# EAGLE board Placa sensores (EAGLE 7.5.0)
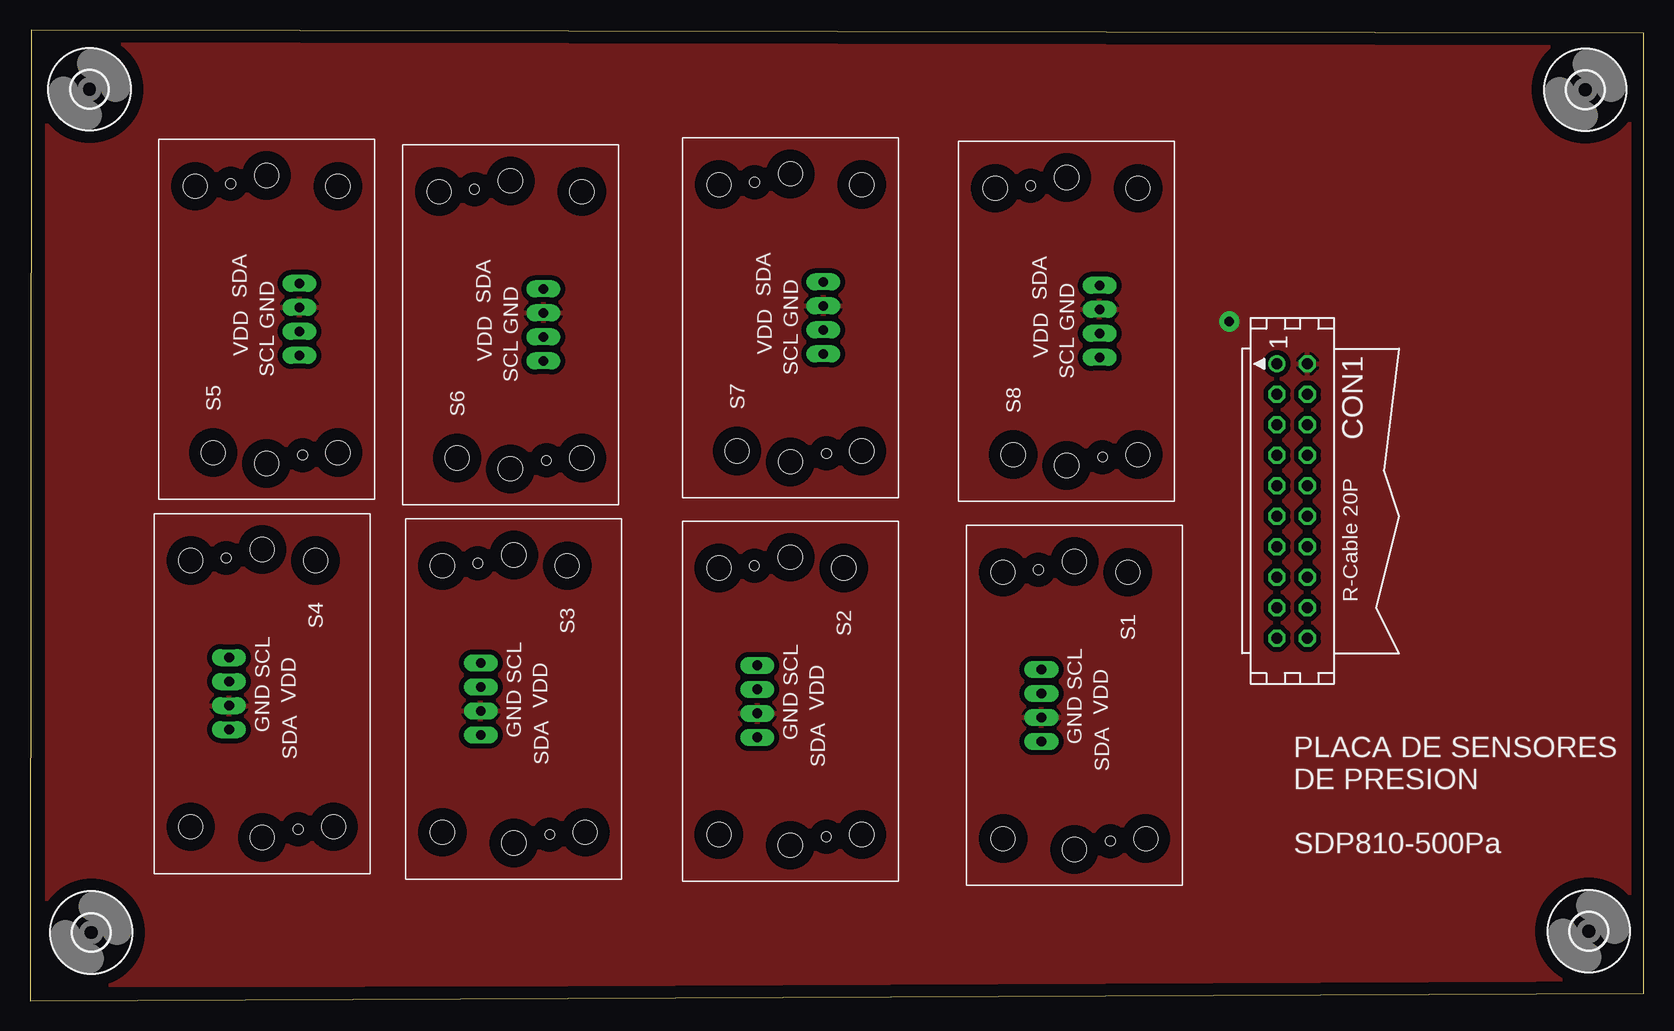
[diagram p0: board, top side]
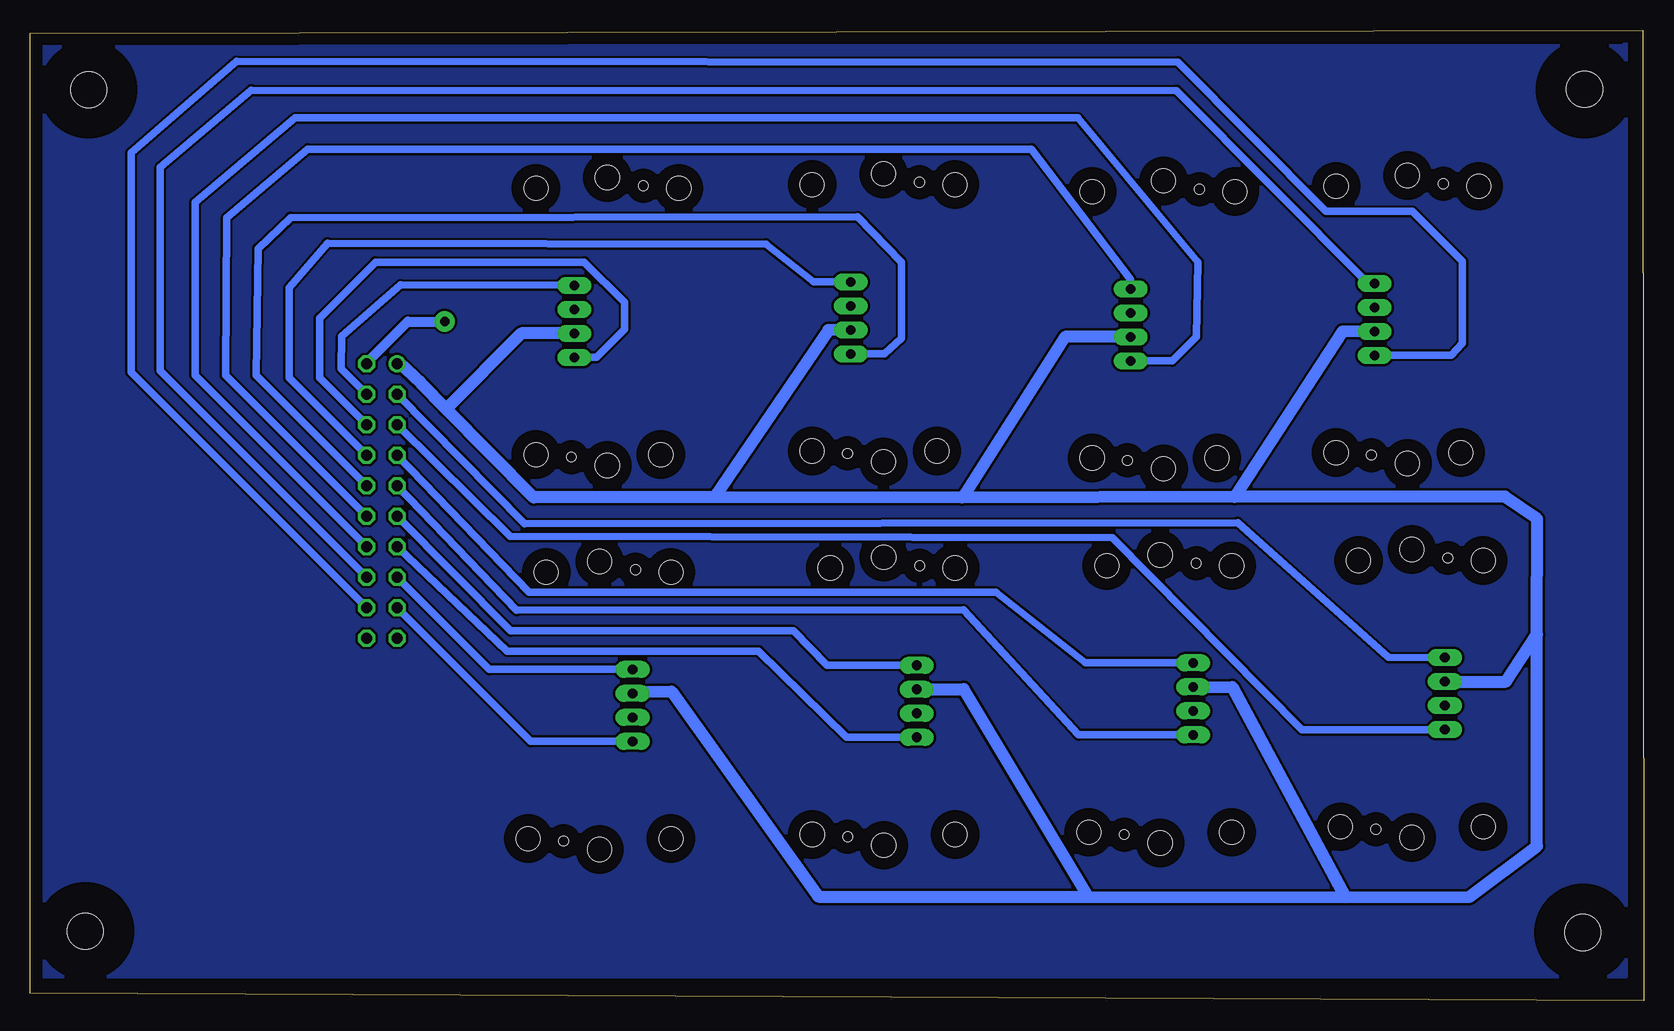
[diagram p1: board, bottom side, seen from below]

Size 134.54 x 80.88 mm. Coordinates in mm from the lower left corner, seen from the top.
Outline: 0,0 134.54,0.63 134.54,80.63 0.11,80.88 0,0
Copper layers (1*16): Top 0.035mm / dielectric 1.5mm / Bottom 0.035mm
Design rules "default": minimum track width 10mil, minimum drill 24mil, track to track 8mil, track to pad 8mil, pad to pad 8mil, via to via 8mil, smd to smd 8mil, copper to edge 40mil, drill to drill 8mil, minimum pad ring 10mil, minimum via ring 8mil, stop-mask expansion 4mil, vias tented up to drill 0mil, thermal gap 10mil

## Footprints (pad centres in the part's own frame; a part is rotated, then mirrored left to right if it is on the bottom)
CON20 = drill 0.914: 1 -11.43,-1.27 | drill 0.914 octagon: 2 -11.43,1.27; 3 -8.89,-1.27; 4 -8.89,1.27; 5 -6.35,-1.27; 6 -6.35,1.27; 7 -3.81,-1.27; 8 -3.81,1.27; 9 -1.27,-1.27; 10 -1.27,1.27; 11 1.27,-1.27; 12 1.27,1.27; 13 3.81,-1.27; 14 3.81,1.27; 15 6.35,-1.27; 16 6.35,1.27; 17 8.89,-1.27; 18 8.89,1.27; 19 11.43,-1.27; 20 11.43,1.27
3,0 = hole 3: 0,0
SDP810-500PA = drill 0.8 pad 1.422 long: GND 1,-2.75; SCL -3,-2.75; SDA 3,-2.75; VDD -1,-2.75 | hole 2: -11.1,-5.95; 11.1,-5.95; 11.1,5.95; -11.1,4.45; -12,0; 12,0 | hole 0.8: -11.3,-3; 11.3,3

## Placement (x,y rotation side)
CON1  [CON20]  105.22,41.63 270 top
H1  MOUNT-HOLE3.0  [3,0]  129.65,75.91 0 top
H2  MOUNT-HOLE3.0  [3,0]  129.93,5.78 0 top
H3  MOUNT-HOLE3.0  [3,0]  5.1,5.67 0 top
H4  MOUNT-HOLE3.0  [3,0]  4.96,75.94 0 top
S1  SDP810-500PA  [SDP810-500PA]  87.06,24.59 270 top
S2  SDP810-500PA  [SDP810-500PA]  63.38,24.94 270 top
S3  SDP810-500PA  [SDP810-500PA]  40.33,25.13 270 top
S4  SDP810-500PA  [SDP810-500PA]  19.35,25.58 270 top
S5  SDP810-500PA  [SDP810-500PA]  19.72,56.76 90 top
S6  SDP810-500PA  [SDP810-500PA]  40.05,56.31 90 top
S7  SDP810-500PA  [SDP810-500PA]  63.39,56.89 90 top
S8  SDP810-500PA  [SDP810-500PA]  86.41,56.59 90 top

## Library data of the parts
CON1 = con-harting; OC_FARNELL: unknown; OC_NEWARK: unknown
H1-H4 = holes
S1-S8 = CESAR

## Nets
GND: CON1.2 S1.GND S2.GND S3.GND S4.GND S5.GND S6.GND S7.GND S8.GND
N$1: CON1.1 S1.VDD S2.VDD S3.VDD S4.VDD S5.VDD S6.VDD S7.VDD S8.VDD
N$2: CON1.6 S8.SCL
N$3: CON1.8 S7.SDA
N$4: CON1.10 S7.SCL
N$5: CON1.18 S5.SCL
N$6: CON1.16 S5.SDA
N$7: CON1.14 S6.SCL
N$9: CON1.4 S8.SDA
N$10: CON1.12 S6.SDA
N$11: CON1.3 S4.SCL
N$12: CON1.5 S4.SDA
N$13: CON1.7 S3.SCL
N$14: CON1.9 S3.SDA
N$15: CON1.17 S1.SDA
N$16: CON1.15 S1.SCL
N$17: CON1.11 S2.SCL
N$18: CON1.13 S2.SDA

## Tracks (layer width: path | path; a pad name or v marks a point on that pad's centre or on a via)
GND  (via drill 0.8 pad 1.68)
  other vias: 99.97,56.59
  pour Top (isolate 0.406): 7.24,79.96 133.6,79.96 133.6,1.5 1.47,1.28 1.47,79.78
N$1
  Bottom 1.016: S1.VDD 84.17,25.73 81.07,25.77 68.82,8.67 46.37,8.66 | 46.37,8.66 24.9,8.61 | 24.9,8.61 14.57,8.64 8.93,12.88 8.92,30.52 | 8.92,30.52 8.91,40.13 11.6,42 34.11,41.98 | 34.11,41.98 56.83,41.92 | 56.83,41.92 77.46,41.96 | 77.46,41.96 92.56,41.94 99.87,49.31 | 99.87,49.31 101.92,51.43 103.8,53.21 CON1.1 | S2.VDD 56.72,25.96 46.37,8.66 | S3.VDD 34.33,26.12 24.9,8.61 | S4.VDD 11.5,26.58 8.92,30.52 | S5.VDD 25.14,55.74 34.11,41.98 | S6.VDD 48.25,55.31 56.83,41.92 | S7.VDD 67.99,55.86 77.46,41.96 | S8.VDD 93.59,55.59 99.87,49.31
N$2
  Bottom 0.61: CON1.6 110.41,51.9 110.41,56.86 105.74,61.53 88.34,61.53 84.99,58.18 84.99,55.94 87.33,53.59 S8.SCL
N$3
  Bottom 0.61: CON1.8 112.95,51.9 112.95,59.4 109.74,63.11 73.19,63.04 69.23,59.91 S7.SDA
N$4
  Bottom 0.61: CON1.10 115.69,52.1 115.52,62.66 112.82,65.24 65.54,65.3 61.91,61.54 61.91,55.2 63.31,53.9 S7.SCL
N$5
  Bottom 0.61: CON1.18 126.12,52.37 126.12,70.65 117.32,78.26 38.84,78.2 26.5,65.76 19.3,65.76 15.14,61.6 15.14,54.77 16.07,53.79 S5.SCL
N$6
  Bottom 0.61: CON1.16 123.68,52.47 123.68,69.46 116.1,75.88 38.96,75.83 23.04,59.83 S5.SDA
N$7
  Bottom 0.61: CON1.14 120.78,52.11 120.78,66.52 112.42,73.55 47.19,73.56 37.18,61.54 37.3,55.33 39.32,53.31 S6.SCL
N$9
  Bottom 0.61: CON1.4 108.6,52.63 108.56,55.35 103.66,59.65 S8.SDA
N$10
  Bottom 0.61: CON1.12 118.23,52.1 118.14,65.24 111.38,70.95 51.05,70.96 42.8,60.12 S6.SDA
N$11
  Bottom 0.61: CON1.3 93.32,39.75 33.86,39.82 21.3,28.59 S4.SCL
N$12
  Bottom 0.61: CON1.5 94.52,38.68 44.31,38.57 28.52,22.57 16.9,22.57 S4.SDA
N$13
  Bottom 0.61: S3.SCL 46.56,28.13 54,34.02 92.95,34.03 CON1.7
N$14
  Bottom 0.61: S3.SDA 47.14,22.13 56.71,32.55 93.96,32.52 CON1.9
N$15
  Bottom 0.61: S1.SDA 92.8,21.59 CON1.17
N$16
  Bottom 0.61: S1.SCL 96.26,27.59 CON1.15
N$17
  Bottom 0.61: S2.SCL 68.1,27.94 70.9,30.81 94.46,30.81 CON1.11
N$18
  Bottom 0.61: S2.SDA 66.46,21.96 73.8,29.11 94.75,29.11 CON1.13
S$1
  Bottom 0.813: 106.48,53.13 103.04,56.57 100.02,56.57
S$2
  pour Bottom: 1.79,79.49 133.65,79.49 133.65,2.06 1.51,2.06 1.51,79.76

## Text on the board
tNames: PLACA DE SENSORES / DE PRESION / / SDP810-500Pa